# Altium PCB SI4468.PcbDoc
Units mm, origin at the board's own origin, x right, y up, seen from the top; angles counter-clockwise.
Board outline 65.02 x 30.16 mm, 2 copper layers (Top Layer, Bottom Layer); 17 components, 19 nets, 70 pads, 26 vias.
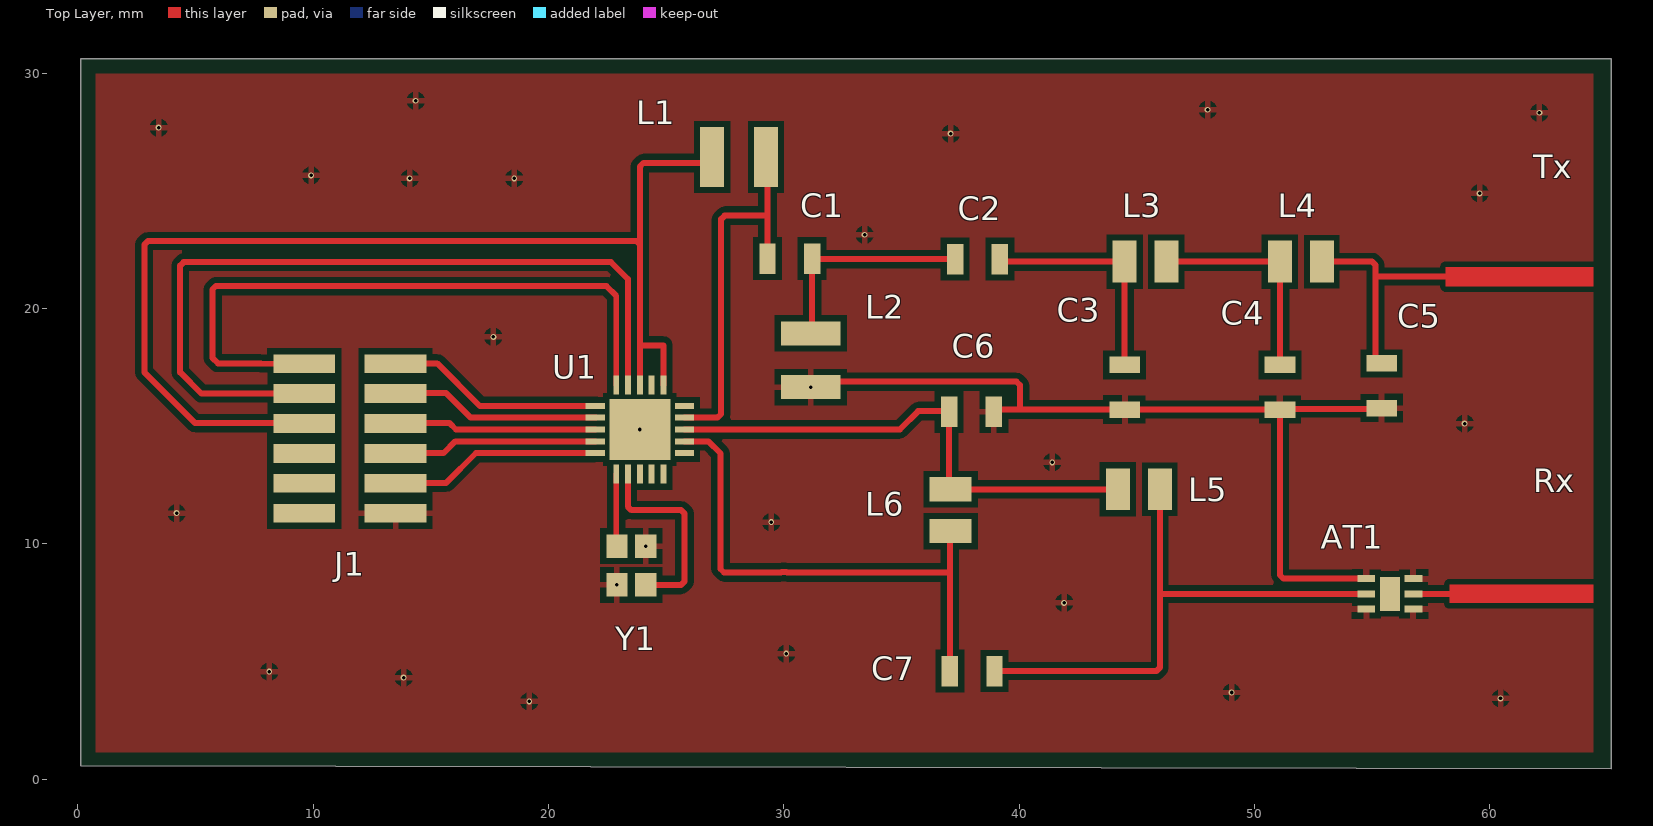
[diagram p0: Top Layer view]
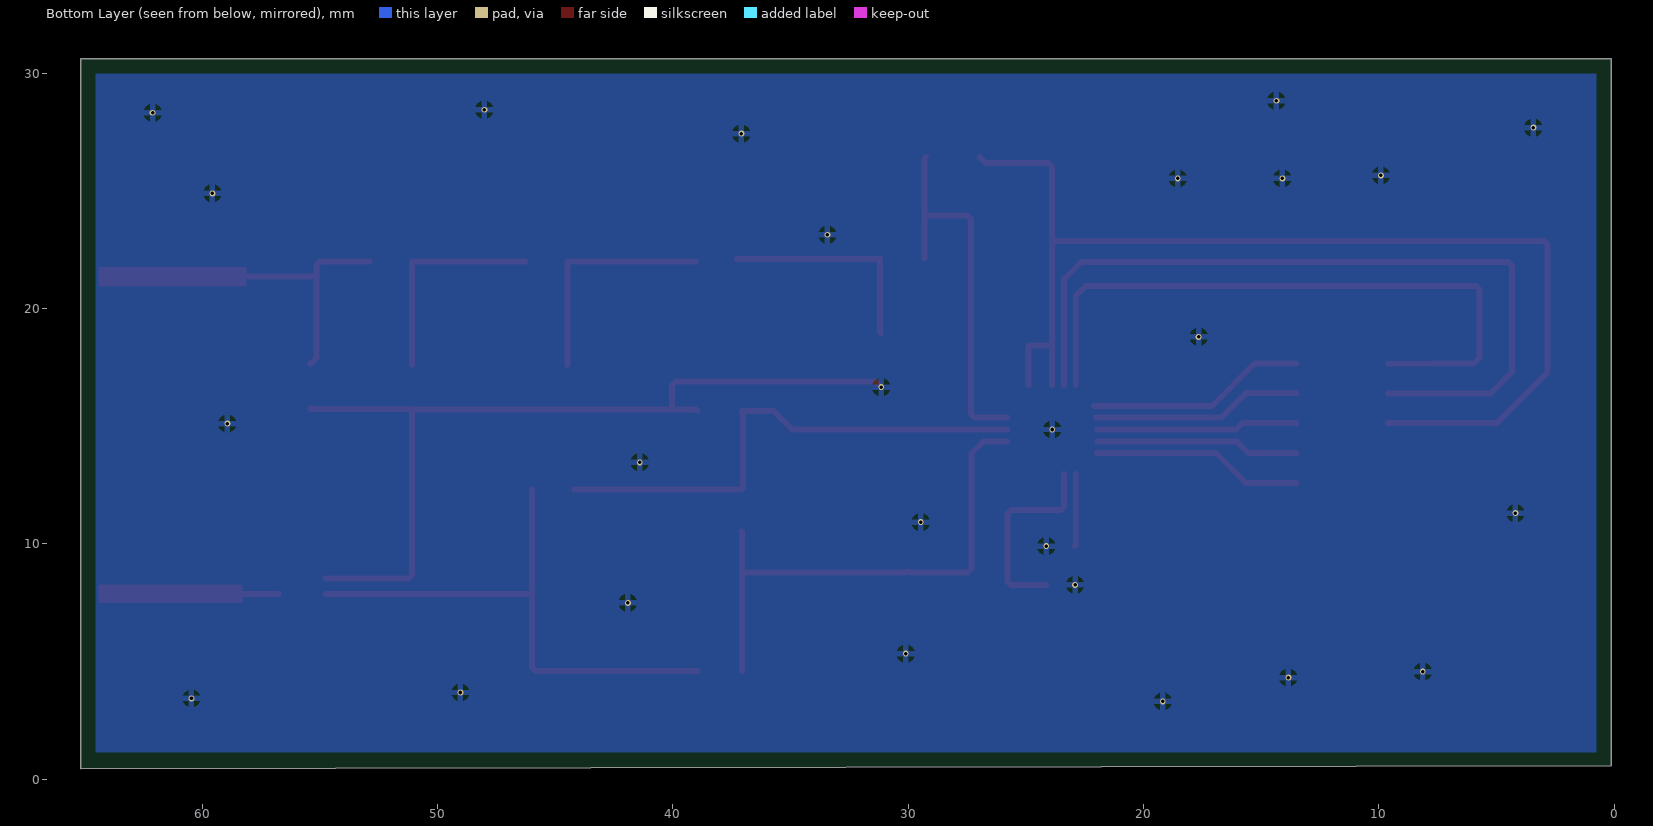
[diagram p1: Bottom Layer view, seen from below]
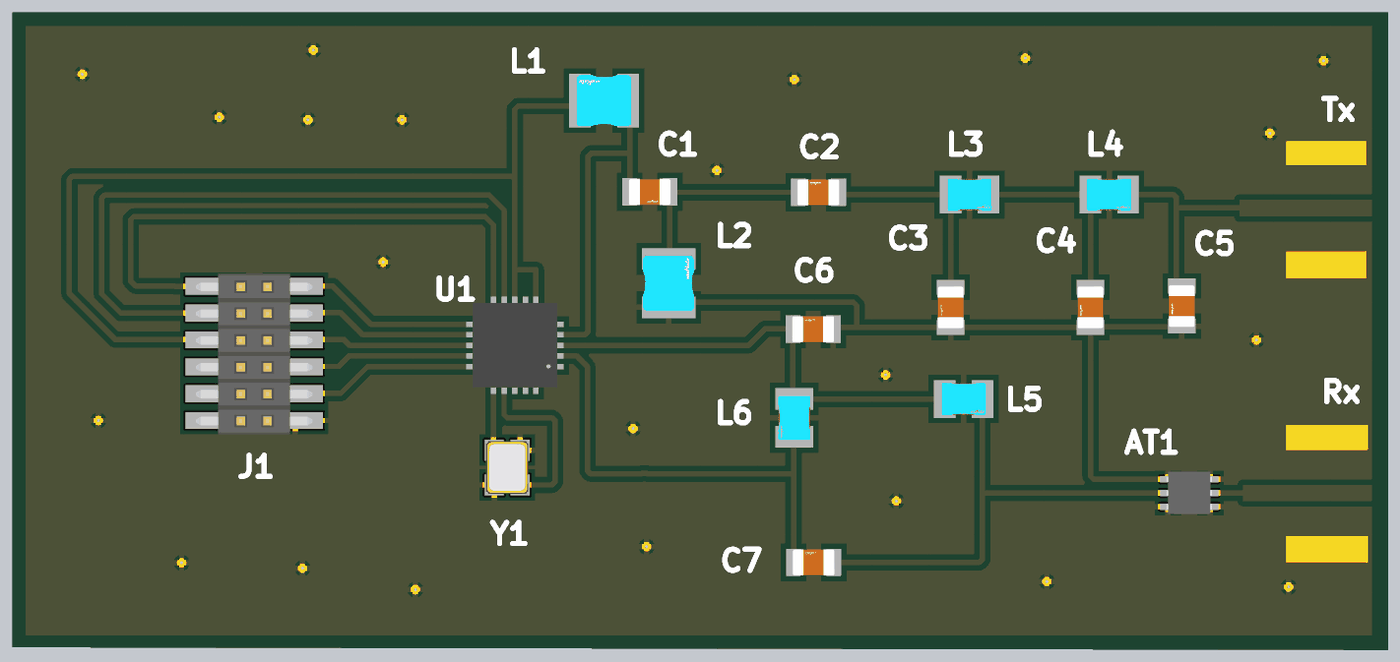
[diagram p2: 3D render of the assembled board from above, using the file's embedded part models]

## Layer stack, top to bottom
Top Solder: solder mask 0.0102, Solder Resist, Dk 3.5
Top Layer: signal copper 0.0356
Dielectric 1: dielectric 0.32, FR-4, Dk 4.8
Bottom Layer: signal copper 0.0356
Bottom Solder: solder mask 0.0102, Solder Resist, Dk 3.5

## Board outline
0.127,0.572 0.127,30.607 65.151,30.607 65.151,0.445

## Design rules (kind name [scope] priority, off if disabled: settings)
Clearance [All] p1: gap=0.254 ignorepadtopadclearanceinfootprint=FALSE except(0: Arc-Hole Track-Hole SMDPad-Hole THPad-Hole Via-Hole Fill-Hole Poly-Hole Region-Hole Text-Hole; 0.15: Arc-Arc Arc-Track Arc-SMDPad Track-Track Track-SMDPad SMDPad-SMDPad; 0.5: THPad-THPad)
MinimumSolderMaskSliver [All] p1: minsoldermaskwidth=0.1
PolygonConnect [All] p1: connectstyle=Relief reliefconductorwidth=0.254 reliefentries=4 polygonreliefangle="90 Angle" airgapwidth=0.254
RoutingLayers [All] p1: top layer_v5=TRUE bottom layer_v5=FALSE
RoutingVias [All] p1: holewidth=0.15 width=0.25 viastyle="Through Hole" minholewidth=0.15 minwidth=0.25 maxholewidth=0.2 maxwidth=0.3
SolderMaskExpansion [All] p1: expansion=0.102 istentingtop=FALSE
Width [All] p1: maxlimit=0.9 minlimit=0.15 preferedwidth=0.254 minimp=50.000000 maximp=50.000000 favimp=50.000000
28 further rules are at their usual default settings.

## Components (designator, comment, footprint, x,y, rotation, side; value= is the part's Value field where it differs from the comment)
AT1 "HMC656LP2ETR" SON65P200X200X100-7N 55.753,7.874 r180 top (schematic designator AT?)
C1 "GRM21A5C2E102FWA1D" FP-GRM21A-0_2-MFG 30.253,22.117 r0 top
C2 "GRM21A5C2J120FWA1D" FP-GRM21A-0_2-MFG 38.227,22.098 r180 top
C3 "GQM2195C2E300GB12D" FP-GRM21A-0_2-MFG 44.477,16.656 r270 top
C4 "GQM2195C2E430GB12D" FP-GRM21A-0_2-MFG 51.081,16.656 r270 top
C5 "GQM2195C2E300GB12D" FP-GRM21A-0_2-MFG 55.399,16.717 r270 top
C6 "GRM21A5C2J120FWA1D" FP-GRM21A-0_2-MFG 37.973,15.621 r180 top
C7 "GQM2195C2E5R6CB12D" FP-GRM21A-0_2-MFG 38,4.591 r180 top
J1 "M50-3600642R" M50-3600642R 11.557,14.478 r90 top (schematic designator J?)
L1 "LQW2UAS1R0F00L" FP-LQW2UAS_00-MFG 28.094,26.435 r180 top
L2 "LQW2UAS56NF00L" FP-LQW2UAS_00-MFG 31.142,17.8 r90 top
L3 "LQW2BAS56NG00L" FP-LQW2BAN_00-MFG 45.366,21.99 r0 top
L4 "LQW2BAS56NG00L" FP-LQW2BAN_00-MFG 51.97,21.99 r0 top
L5 "LQW2BASR15G00L" FP-LQW2BAN_00-MFG 45.085,12.319 r0 top
L6 "LQW2BASR24G00L" FP-LQW2BAN_00-MFG 37.084,11.43 r270 top
U1 "SI4468-A2A-IMR" QFN20_Si44687_SIL 23.876,14.859 r180 top (schematic designator U?)
Y1 "30MHz" WE-XTAL_CFPX-218 23.518,9.08 r270 top

## Footprints (in the part's own frame and the unit in brackets; to place one, negate y for a bottom-side part, rotate by r counter-clockwise, add the part's x,y. Pads: shape width x height; smd on the part's side, far side on the other; paste and mask are expansions set on the pad)
FP-GRM21A-0_2-MFG [mm]
  rect 0.7x1.3 smd paste+0 mask+0: 1(-0.95,0) 2(0.95,0)
  body extent -1.4,-0.82 1.4,0.82, height 0.25
FP-LQW2BAN_00-MFG [mm]
  rect 1.02x1.78 smd paste+0 mask+0: 1(-0.89,0) 2(0.89,0)
  body extent -1.5,-0.99 1.5,0.99, height 0.25
FP-LQW2UAS_00-MFG [mm]
  rect 1.015x2.54 smd paste+0 mask+0: 1(-1.142,0) 2(1.142,0)
  body extent -1.75,-1.43 1.75,1.43, height 0.25
M50-3600642R [mm]
  rect 0.8x2.62 smd: 1(-3.175,1.94) 2(-3.175,-1.94) 3(-1.905,1.94) 4(-1.905,-1.94) 5(-0.635,1.94) 6(-0.635,-1.94) 7(0.635,1.94) 8(0.635,-1.94) 9(1.905,1.94) 10(1.905,-1.94) 11(3.175,1.94) 12(3.175,-1.94)
  body extent -3.83,-2.75 3.78,2.75, height 4.6
QFN20_Si44687_SIL [mil]
  rect 32x10 smd paste+0 mask+0: 1(-74.5,39.37) 2(-74.5,19.68) 3(-74.5,0) 4(-74.5,-19.68) 5(-74.5,-39.37) 11(74.5,-39.37) 12(74.5,-19.68) 13(74.5,0) 14(74.5,19.68) 15(74.5,39.37)
  rect 10x32 smd paste+0 mask+0: 6(-39.37,-74.5) 7(-19.68,-74.5) 8(0,-74.5) 9(19.68,-74.5) 10(39.37,-74.5) 16(39.37,74.5) 17(19.68,74.5) 18(0,74.5) 19(-19.68,74.5) 20(-39.37,74.5)
  rect 102x102 smd paste-51 mask+0: 21(0,0)
  body extent -79,-79 79,79, height 35
SON65P200X200X100-7N [mm]
  rect 0.75x0.3 smd: 1(-1,0.65) 2(-1,0) 3(-1,-0.65) 4(1,-0.65) 5(1,0) 6(1,0.65)
  rect 0.85x1.45 smd: 7(0,0)
  body extent -1.05,-1 1.05,1, height 1
WE-XTAL_CFPX-218 [mm] "Quartz Crystal, size CFPX-218, body 2.5x2mm"
  rect 1x0.9 smd: 1(-0.825,-0.612) 2(0.825,-0.612) 3(0.825,0.612) 4(-0.825,0.612)
  body extent -1.25,-1 1.25,1, height 0.55

## Part data
AT1: "Attenuator or Isolator", Manufacturer_Name="Analog Devices", Mouser Part Number=584-HMC656LP2ETR, Arrow Part Number=HMC656LP2ETR, Arrow Price/Stock=https://www.arrow.com/en/products/hmc656lp2etr/analog-devices, Datasheet Link=https://www.analog.com/media/en/technical-documentation/data-sheets/hmc656lp2-hmc658lp2.pdf, Height=1mm, Manufacturer_Part_Number=HMC656LP2ETR, Mouser Price/Stock=https://www.mouser.co.uk/ProductDetail/Analog-Devices/HMC656LP2ETR?qs=3izLlwrMQ7khzsLKjIESFw%3D%3D
C1 C2 C3 C4 C5 C6 C7: library part CMP-06035-012030-1, "Chip Multilayer Ceramic Capacitors for General Purpose, 0805, 1000pF, C0G, 30ppm/°C, 1%, 250V"
J1: "Connector", Manufacturer_Name=Harwin, Datasheet Link=https://cdn.harwin.com/pdfs/M50-360R.pdf, Manufacturer_Part_Number=M50-3600642R
L1: library part CMP-06042-008432-1, "Wire Wound RF Inductor 1000nH ±1% 370mA 1.75Ω 1008 (2520)", Case/Package=1008, Current Rating=370mA, DC Resistance (DCR)=1.75R, Inductance=1uH, Max Operating Temperature=125°C, Min Operating Temperature=-55°C, Resistor Type=Wirewound, Self Resonant Frequency=290MHz, Test Frequency=25MHz, Tolerance=1%, Core Material=Non-Magnetic, Mount="Surface Mount", Packaging="Cut Tape", Shielding=Unshielded
L2: library part CMP-06042-009211-1, "Wire Wound RF Inductor 56nH ±1% 1000mA 0.18Ω 1008 (2520)"
L3 L4: library part CMP-06042-001883-1, "Wire Wound RF Inductor 56nH ±2% 500mA 0.34Ω 0805 (2015)", Case/Package=0805, Current Rating=500mA, DC Resistance (DCR)=340mR, Inductance=56nH, Max Operating Temperature=85°C, Min Operating Temperature=-40°C, Package Quantity=2000, Resistor Type=Wirewound, Self Resonant Frequency=1.6GHz, Test Frequency=200MHz, Tolerance=2%, Height - Seated (Max)=0.061inch, Length=0.082inch, Mount="Surface Mount", Packaging="Tape and Reel", Shielding=Unshielded, Width=0.06inch
L5: library part CMP-06042-011202-1, "Wire Wound RF Inductor 150nH ±2% 400mA 0.56Ω 0805 (2015)", Case/Package=0805, Current Rating=400mA, DC Resistance (DCR)=560mR, Inductance=150nH, Max Operating Temperature=85°C, Min Operating Temperature=-40°C, Package Quantity=2000, Resistor Type=Wirewound, Self Resonant Frequency=920MHz, Test Frequency=100MHz, Tolerance=2%, Height - Seated (Max)=0.061inch, Length=0.082inch, Mount="Surface Mount", Packaging="Tape and Reel", Shielding=Unshielded, Width=0.06inch
L6: library part CMP-06042-000501-1, "Wire Wound RF Inductor 240nH ±2% 350mA 1Ω 0805 (2015)", Case/Package=0805, Current Rating=350mA, DC Resistance (DCR)=1R, Inductance=240nH, Max Operating Temperature=85°C, Min Operating Temperature=-40°C, Package Quantity=2000, Resistor Type=Wirewound, Self Resonant Frequency=770MHz, Test Frequency=100MHz, Tolerance=2%, Height - Seated (Max)=0.061inch, Length=0.082inch, Mount="Surface Mount", Packaging="Tape and Reel", Shielding=Unshielded, Width=0.06inch
U1: "No Description Available", Mfr_Name="Silicon Labs", RefDes=RefDes, Type=Type
Y1: library part 830107284409, "WE-XTAL Quartz Crystal, SMT, CFPX-218, 30MHz, +/-10ppm", Case/Size Code=CFPX-218, Frequency Stability=+/-10ppm, Load Capacitance=10pF, Manufacturer="Wurth Elektronik", Operating Temperature Max=70°C, Operating Temperature Min=-20°C, Category=Crystals, ComponentLink1Description="Website Link", ComponentLink1URL=https://www.we-online.com/redexpert/article/830107284409?ad, ComponentLink2Description="Datasheet Link", ComponentLink2URL=https://www.we-online.com/redexpert/spec/830107284409?ad, Frequency=30MHz, Frequency Tolerance=+/-10ppm, Height=0.6mm, Length=2.5mm, Manufacturer Part Number=830107284409, Match Code=WE-XTAL, Mount="Surface Mount", Packaging="Tape and Reel", Width=2mm

## Via types
v1: diameter 0.25, hole 0.15, Top Layer to Bottom Layer, 26 vias

## Nets (pads, with @x,y where several pads share a name; then routed paths per layer and width w, separated by ;. In a path a pad name is that pad's centre, name@x,y a point inside that pad or via, vN(x,y) a via of type N, cw(c..) or ccw(c..) an arc to the next point about the centre after c; other vN are vias at no path point)
GND: AT1.1 AT1.3 AT1.4 AT1.6 C3.2 C4.2 C5.2 C6.1 J1.2 L2.1 U1.21 Y1.2 Y1.4 | length 37.4
  Top Layer w0.254: v1(31.142,16.657) 31.376,16.891 39.884,16.891 40.033,16.742 40.033,15.744 40.071,15.706 ; C6.1@38.95,15.64 39.016,15.706 40.071,15.706 ; AT1.4 51.23,8.524 51.081,8.673 C4.2 ; C5.2 55.368,15.736 51.111,15.736 C4.2 ; 40.071,15.706 C3.2 C4.2
  other v1: 19.177,3.302 60.452,3.429 49.022,3.683 13.843,4.318 8.128,4.572 30.099,5.334 41.91,7.493 22.905,8.255 24.13,9.905 29.464,10.922 4.191,11.303 41.402,13.462 23.876,14.859 58.928,15.113 17.653,18.796 33.428,23.133 59.563,24.892 14.097,25.527 18.542,25.527 9.906,25.654 37.084,27.432 3.429,27.686 62.103,28.321 48.006,28.448 14.351,28.829
GPIO0: J1.9 U1.9 | length 34.1
  Top Layer w0.254: J1.9 5.253,16.383 4.345,17.291 4.345,21.822 4.494,21.971 22.652,21.971 23.368,21.255 23.368,21.209 23.376,21.201 U1.9
GPIO1: J1.11 U1.10 | length 28.1
  Top Layer w0.254: J1.11 7.792,17.653 7.773,17.672 5.95,17.672 5.715,17.907 5.715,20.806 5.864,20.955 22.457,20.955 22.876,20.536 U1.10
NetAT?_5: AT1.5 C7.1 L5.2 | length 23.5
  Top Layer w0.254: C7.1 45.825,4.591 45.974,4.74 45.974,7.855 ; L5.2 L5.2 45.974,7.855 ; AT1.5 45.993,7.874 45.974,7.855
NetC1_2: C1.2 C2.2 L2.2 | length 9.3
  Top Layer w0.254: L2.2 31.203,19.003 C1.2 31.222,22.098 C2.2
NetC2_1: C2.1 C3.1 L3.1 | length 9.9
  Top Layer w0.254: C2.1@39.007,21.99 L3.1 44.477,21.989 C3.1
NetC4_1: C4.1 L3.2 L4.1 | length 9.2
  Top Layer w0.254: L3.2 L4.1 51.081,21.989 C4.1
NetC5_1: C5.1 L4.2 | length 10
  Top Layer w0.254: L4.2 54.996,21.99 55.145,21.841 55.145,21.358 ; C5.1@55.406,17.66 C5.1 55.368,17.667 55.145,17.89 55.145,21.358 ; 58.42,21.336 58.42,21.358 55.145,21.358
NetU?_16: U1.16 Y1.1 | length 3.1
  Top Layer w0.254: U1.16 22.876,9.934 Y1.1
NetU?_17: U1.17 Y1.3 | length 8.5
  Top Layer w0.254: U1.17 23.376,12.613 23.368,12.605 23.368,11.579 23.517,11.43 25.632,11.43 25.781,11.281 25.781,8.404 25.632,8.255 Y1.3
nIRQ: J1.12 U1.11 | length 9.4
  Top Layer w0.254: J1.12 13.516,17.672 15.267,17.672 17.08,15.859 U1.11@22.099,15.859
nSEL: J1.4 U1.15 | length 9
  Top Layer w0.254: J1.4 13.516,12.592 15.648,12.592 16.915,13.859 U1.15
RXn: C6.2 L5.1 L6.1 U1.3 | length 22.1
  Top Layer w0.254: U1.3 34.925,14.859 35.706,15.64 37.05,15.64 37.023,15.613 37.023,12.381 L6.1 L6.1 L5.1
RXp: C7.2 L6.2 U1.2 | length 22.4
  Top Layer w0.254: U1.2 26.789,14.359 27.305,13.843 27.305,8.931 27.454,8.782 29.872,8.782 29.894,8.804 30.104,8.804 30.127,8.781 36.984,8.781 ; C7.2 37.05,10.506 L6.2
SCLK: J1.10 U1.12 | length 9
  Top Layer w0.254: J1.10 13.516,16.402 15.648,16.402 16.691,15.359 U1.12@22.014,15.359
SDI: J1.6 U1.14 | length 8.7
  Top Layer w0.254: J1.6 13.516,13.862 15.541,13.862 16.038,14.359 U1.14
SDO: J1.8 U1.13 | length 8.6
  Top Layer w0.254: J1.8 13.516,15.132 15.795,15.132 16.068,14.859 U1.13
Tx_in: C1.1 L1.1 U1.4 | length 16.3
  Top Layer w0.254: U1.4 27.175,15.359 27.332,15.516 27.332,23.8 27.481,23.949 29.303,23.949 ; L1.1 29.303,26.369 29.303,23.949 ; C1.1 29.303,23.949
VCC: J1.7 L1.2 U1.6 U1.8 | length 49.5
  Top Layer w0.254: J1.7 9.598,15.132 4.98,15.132 2.821,17.291 2.821,22.711 2.97,22.86 23.749,22.86 23.876,22.733 ; U1.8 23.876,18.412 ; U1.6 24.876,18.431 23.895,18.431 23.876,18.412 ; L1.2 26.698,26.181 24.025,26.181 23.876,26.032 23.876,22.86 23.876,22.733 ; 23.876,18.412 23.876,22.733
pads on no net: AT1.2 AT1.7 J1.1 J1.3 J1.5 U1.1 U1.5 U1.7 U1.18 U1.19 U1.20
copper on no net: | length 1.5
  Top Layer w0.254: 56.753,7.874 58.293,7.874

## Polygon pours and split planes (outlines as drawn)
GND on Bottom Layer "GND_L02_P000" (solid, pour order 0): 0.762,29.972 64.516,29.972 64.516,1.143 0.762,1.143
GND on Top Layer "GND_L01_P002" (solid, pour order 2): 0.762,1.143 0.762,29.972 64.389,29.972 64.389,1.143
no net on Top Solder "NONET_L-01_P-001" (solid): 64.198,9.906 60.33,9.906 60.33,11.1 64.198,11.1
no net on Top Solder "NONET_L-01_P-001" (solid): 64.198,4.572 60.33,4.572 60.33,5.842 64.198,5.842
no net on Top Solder "NONET_L-01_P-001" (solid): 64.135,18.034 60.33,18.034 60.33,19.304 64.135,19.304
no net on Top Solder "NONET_L-01_P-001" (solid): 64.135,23.368 60.33,23.368 60.33,24.511 64.135,24.511
no net on Bottom Solder "NONET_L-01_P-001" (solid): 1.905,3.937 3.556,3.937 3.556,2.286 1.905,2.286

## Other copper
Top Layer:
  region: 58.293,8.255 64.389,8.255 64.389,7.493 58.293,7.493
  region net NetC5_1: 58.131,21.752 64.389,21.752 64.389,20.955 58.131,20.955

## Silkscreen, mask and mechanical layers (free items; w line width, h text height)
Top Overlay:
  text "Tx" at 61.849,25.527 h1
  text "Rx" at 61.849,12.192 h1
Mechanical 1:
  lines w0.254: 0.381,0.762 0.381,30.353 64.897,30.353 64.897,22.765 64.897,8.604 64.897,0.762 0.381,0.762

## Text inside footprints (layer, text, board x,y; h text height)
U1: Mechanical 13 "*" at 25.679,14.244 h1.27 r180